# Altium PCB PCB_Pixhawk_Linux_Carrier_2021-08-31.pcbdoc (part 1 of 2)
Units mm, origin at the board's own origin, x right, y up, seen from the top; angles counter-clockwise.
Board outline 111.76 x 82.8 mm, 2 copper layers (Top Layer, Bottom Layer); 53 components, 220 nets, 468 pads, 151 vias.
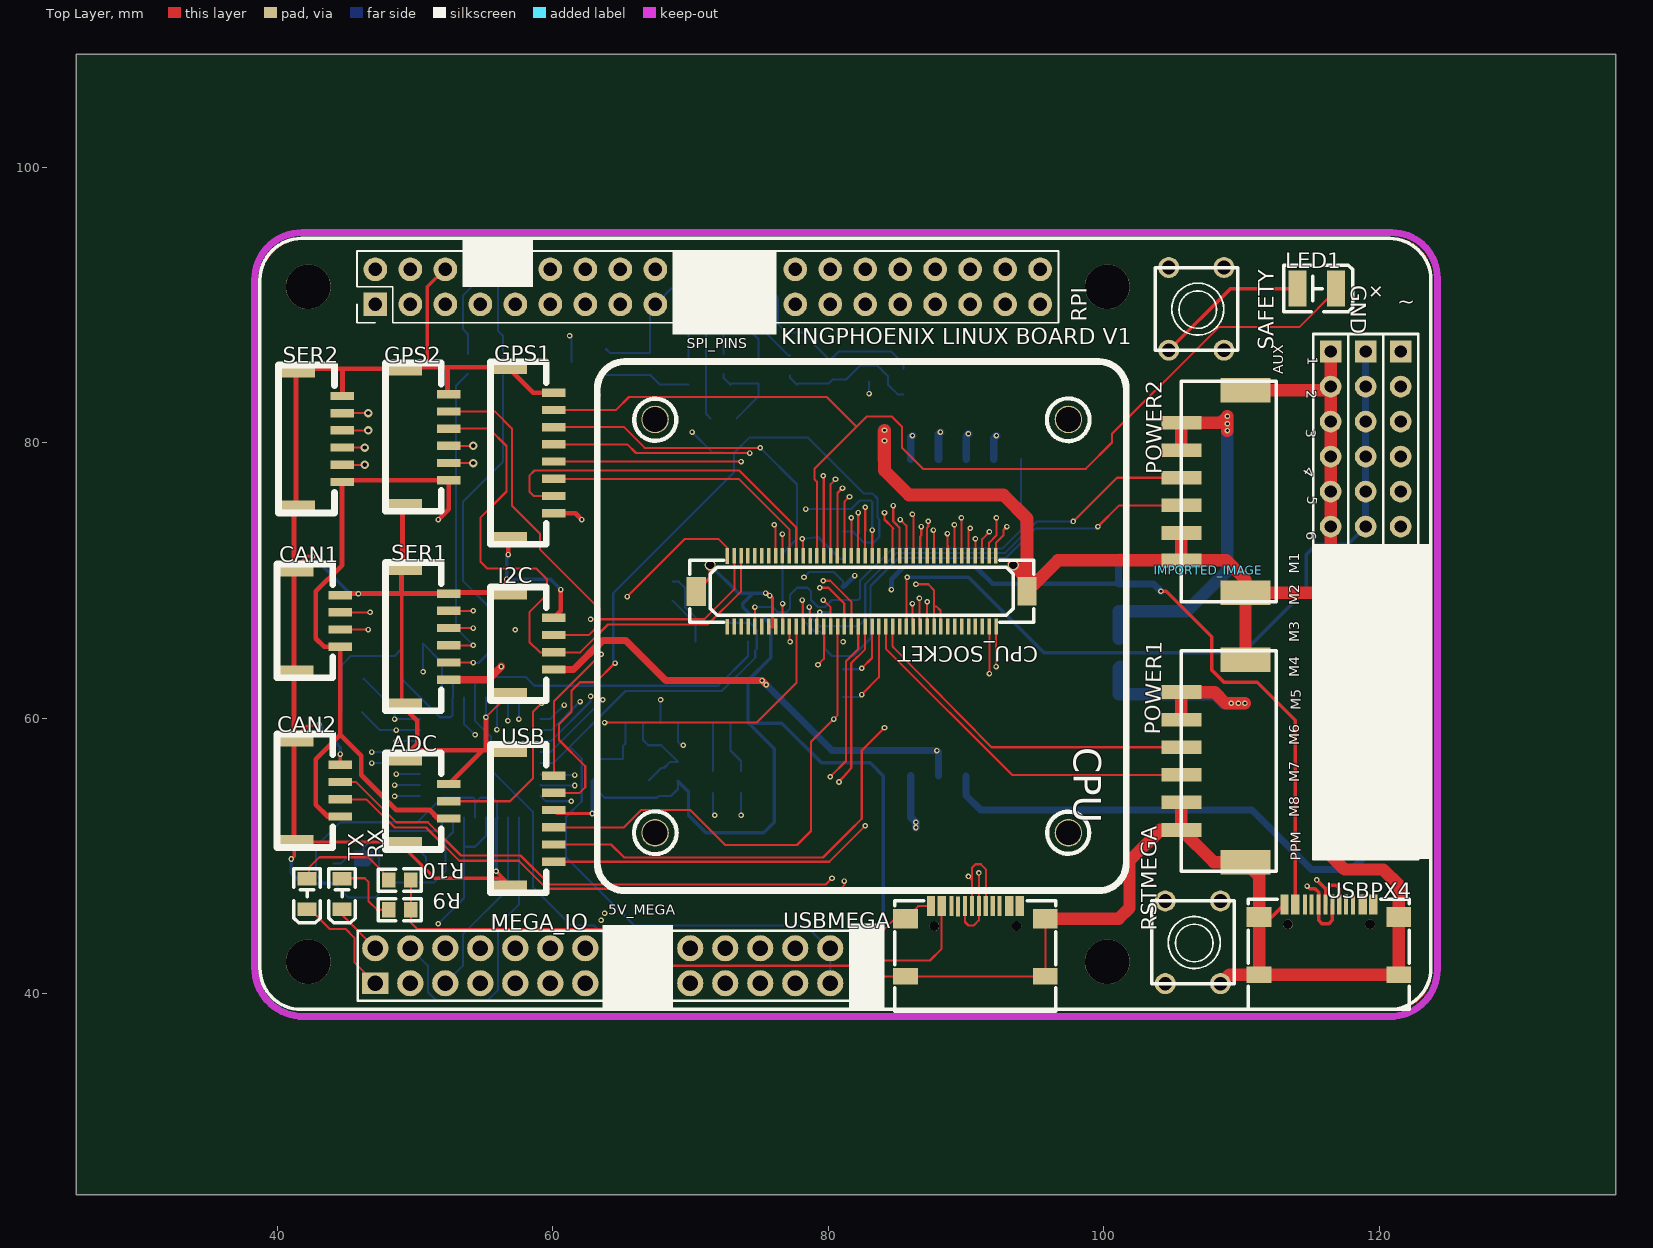
[diagram p0: Top Layer view]
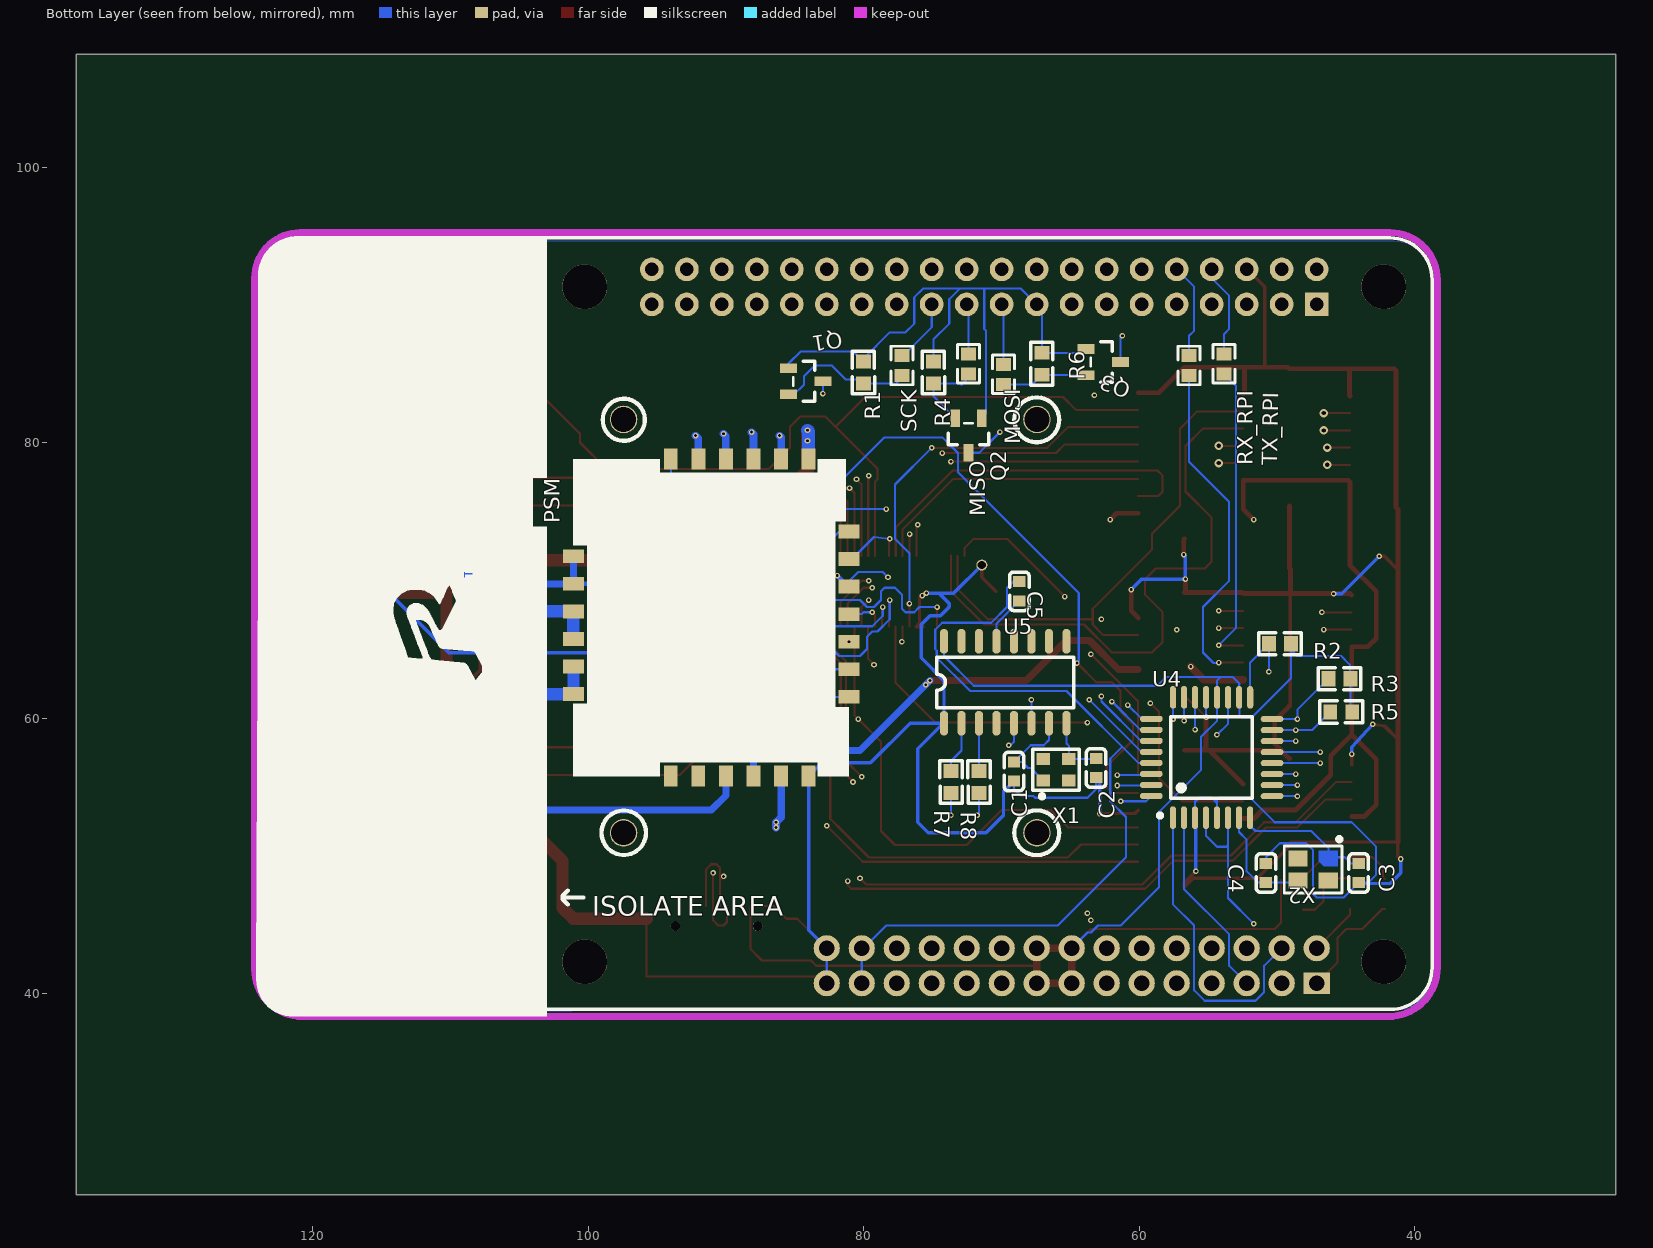
[diagram p1: Bottom Layer view, seen from below]

## Layer stack, top to bottom
Top Layer: signal copper (thickness not stored)
Dielectric: dielectric 0.32, FR-4, Dk 4.8
Bottom Layer: signal copper (thickness not stored)

## Board outline
137.16,25.4 25.4,25.4 25.4,108.204 137.16,108.204

## Components (designator, comment, footprint, x,y, rotation, side; value= is the part's Value field where it differs from the comment)
+ "SERVO_VCC" HDR-TH_15P-P2.54-V 118.999,68.834 r270 top
ADC "ADC" BM03B-GHS-TBT 52.451,53.975 r90 top
C1 "22pF" C0603 69.088,56.134 r270 bottom
C2 "22pF" C0603 63.119,56.388 r270 bottom
C3 "22pF" C0603 44.069,48.768 r270 bottom
C4 "22pF" C0603 50.8,48.768 r90 bottom
C5 "100nF" C0603 68.707,69.215 r90 bottom
CAN1 "CAN 1" BM04B-GHS-TBT 44.577,67.056 r90 top
CAN2 "CAN 2" BM04B-GHS-TBT 44.577,54.737 r90 top
CPU_SOCKET "pixhawk Cube" CON-DF17-80M 82.423,69.215 r180 top
GND "GND" HDR-TH_15P-P2.54-V 116.459,68.834 r270 top
GPS1 "GPS 1" BM08B-GHS-TBT 60.071,79.248 r90 top
GPS2 "GPS 2" BM06B-GHS-TBT 52.451,80.391 r90 top
I2C "I2C" BM04B-GHS-TBT 60.071,65.405 r90 top
IMPORTED_IMAGE "IMPORTED_IMAGE" IMPORTED_IMAGE 107.584,70.738 r0 top
LED1 "SAFETY" LED-SMD_L3.5-W2.8-R-RD 115.443,91.186 r180 top
MEGA_IO "Header-Male-2.54_2x15" HDR-TH_30P-P2.54-V-R2-C15-S2.54 64.897,42.037 r0 top
MISO "MOSI_CONNCECT" 0603 72.39,85.725 r270 bottom
MOSI "SCK_CONNCECT" 0603 69.85,84.963 r270 bottom
POWER1 "Power_1" "MOLEX CLICKMATE 2.0-6P" 107.95,56.896 r90 top
POWER2 "Power_2" "MOLEX CLICKMATE 2.0-6P" 107.95,76.454 r90 top
PSM "Power Selection Module" "POWER SELECTION MODULE" 91.313,67.056 r270 bottom
Q1 "BSS138" SOT-23-3_L2.9-W1.3-P1.90-LS2.4-BR 84.201,84.455 r180 bottom
Q2 "BSS138" SOT-23-3_L2.9-W1.3-P1.90-LS2.4-BR 72.39,80.518 r270 bottom
Q3 "BSS138" SOT-23-3_L2.9-W1.3-P1.90-LS2.4-BR 62.611,85.852 r180 bottom
R1 "10K" R0603#1 80.01,85.09 r270 bottom
R2 "10K" R0603#1 49.784,65.405 r0 bottom
R3 "10K" R0603#1 45.466,62.865 r0 bottom
R4 "10K" R0603#1 74.93,85.09 r270 bottom
R5 "10K" R0603#1 45.339,60.452 r0 bottom
R6 "10K" R0603#1 67.056,85.725 r270 bottom
R7 "1K" R0603#1 73.66,55.372 r90 bottom
R8 "1K" R0603#1 71.628,55.372 r90 bottom
R9 "1K" R0603#2 48.895,46.101 r180 top
R10 "1K" R0603#2 48.895,48.26 r180 top
RPI "RASPBERRY PI 4B" "RASPBERRY PI 4B" 47.117,90.043 r0 top
RSTMEGA "RESET_ARDU" SWITCH-6X6X5_TH 108.585,40.64 r0 top
RX "LEDRX" LED0805-RD 44.704,47.244 r90 top
RX_RPI "SCK_CONNCECT" 0603 56.388,85.598 r270 bottom
SAFETY "SAFETY" SWITCH-6X6X5_TH 108.839,86.614 r0 top
SCK "MISO_CONNECT" 0603 77.216,85.598 r270 bottom
SER1 "Telemetry 1" BM06B-GHS-TBT 52.451,65.913 r90 top
SER2 "Telemetry 2" BM06B-GHS-TBT 44.704,80.264 r90 top
TX "LEDTX" LED0805-RD 42.164,47.244 r90 top
TX_RPI "SCK_CONNCECT" 0603 53.848,85.725 r270 bottom
U4 "ATMEGA328P-AU" TQFP-32_L7.0-W7.0-P0.80-LS9.0-BL 54.737,57.15 r0 bottom
U5 "CH340G" SOIC-16_L9.9-W3.9-P1.27-LS6.0-TL 69.723,62.611 r0 bottom
USB "USB" BM06B-GHS-TBT 60.071,52.705 r90 top
USBMEGA "DEBUG_ARDU" USB-C-SMD_TYPEC-304S-ACP16 90.678,43.815 r0 top
USBPX4 "DEBUG_PX4" USB-C-SMD_TYPEC-304S-ACP16 116.332,43.942 r0 top
X1 "12MHz" OSC-SMD_4P-L2.5-W2.0-BL 66.04,56.261 r0 bottom
X2 "16MHz" OSC-SMD_4P-L3.2-W2.5-BL 47.371,49.022 r180 bottom
~ "DATA" HDR-TH_15P-P2.54-V 121.539,68.834 r270 top

## Footprints (in the part's own frame and the unit in brackets; to place one, negate y for a bottom-side part, rotate by r counter-clockwise, add the part's x,y. Pads: shape width x height; smd on the part's side, far side on the other; paste and mask are expansions set on the pad)
0603 [mm]
  rect 0.95x1.1 smd: 1(0.725,0) 2(-0.725,0)
  silkscreen extent -1.4,-0.8 1.4,0.8
BM03B-GHS-TBT [mm]
  rect 0.6x1.7 smd: 1(-1.25,0) 2(0,0) 3(1.25,0)
  rect 1x2.8 smd: GND(-3.1,3.35) GND(3.1,3.35)
  silkscreen extent -3.5,0.55 3.5,4.6
BM04B-GHS-TBT [mm]
  rect 0.6x1.7 smd: 1(-1.87,0) 2(-0.62,0) 3(0.63,0) 4(1.88,0)
  rect 1x2.8 smd: GND(-3.721,3.35) GND(3.729,3.35)
  silkscreen extent -4.12,0.55 4.13,4.6
BM06B-GHS-TBT [mm]
  rect 0.6x1.7 smd: 1(-3.12,0) 2(-1.87,0) 3(-0.62,0) 4(0.63,0) 5(1.88,0) 6(3.13,0)
  rect 1x2.8 smd: GND(-4.97,3.35) GND(4.97,3.35)
  silkscreen extent -5.37,0.55 5.38,4.6
BM08B-GHS-TBT [mm]
  rect 0.6x1.7 smd: 1(-4.37,0) 2(-3.12,0) 3(-1.87,0) 4(-0.62,0) 5(0.63,0) 6(1.88,0) 7(3.13,0) 8(4.38,0)
  rect 1x2.8 smd: GND(-6.22,3.35) GND(6.23,3.35)
  silkscreen extent -6.62,0.55 6.63,4.6
C0603 [mm]
  rect 0.8x0.9 smd: 1(0.7,0) 2(-0.7,0)
  silkscreen extent -1.4,-0.72 1.4,0.7
CON-DF17-80M [mm]
  rect 0.254x1.15 smd: 1(9.75,2.57) 2(9.75,-2.57) 3(9.252,2.565) 4(9.251,-2.575) 5(8.754,2.567) 6(8.755,-2.578) 7(8.254,2.567) 8(8.259,-2.577) 9(7.752,2.566) 10(7.757,-2.578) 11(7.252,2.566) 12(7.257,-2.578) 13(6.751,2.566) 14(6.755,-2.578) 15(6.251,2.566) 16(6.256,-2.578) 17(5.751,2.566) 18(5.755,-2.578) 19(5.251,2.565) 20(5.256,-2.579) 21(4.751,2.566) 22(4.755,-2.578) 23(4.25,2.566) 24(4.254,-2.578) 25(3.751,2.566) 26(3.755,-2.578) 27(3.252,2.567) 28(3.258,-2.575) 29(2.751,2.566) 30(2.757,-2.577) 31(2.257,2.567) 32(2.256,-2.578) 33(1.752,2.566) 34(1.761,-2.577) 35(1.253,2.567) 36(1.257,-2.578) 37(0.752,2.566) 38(0.758,-2.577) 39(0.253,2.566) 40(0.257,-2.578) 41(-0.249,2.566) 42(-0.242,-2.578) 43(-0.747,2.566) 44(-0.744,-2.578) 45(-1.248,2.566) 46(-1.242,-2.578) 47(-1.749,2.566) 48(-1.743,-2.578) 49(-2.248,2.566) 50(-2.245,-2.578) 51(-2.748,2.566) 52(-2.743,-2.578) 53(-3.246,2.566) 54(-3.244,-2.578) 55(-3.749,2.566) 56(-3.742,-2.578) 57(-4.245,2.565) 58(-4.245,-2.578) 59(-4.747,2.566) 60(-4.741,-2.579) 61(-5.248,2.566) 62(-5.244,-2.578) 63(-5.748,2.566) 64(-5.743,-2.578) 65(-6.247,2.567) 66(-6.244,-2.578) 67(-6.746,2.568) 68(-6.742,-2.577) 69(-7.248,2.566) 70(-7.242,-2.576) 71(-7.749,2.566) 72(-7.743,-2.578) 73(-8.245,2.566) 74(-8.245,-2.578) 75(-8.748,2.566) 76(-8.741,-2.578) 77(-9.246,2.566) 78(-9.244,-2.578) 79(-9.748,2.566) 80(-9.742,-2.578)
  round 2 hole 1.8: 81(-15,-12.47) 82(15,17.53) 83(-15,17.53) xx(15,-12.47)
  round 0.8 hole 0.6: HOLE1(11.001,-1.9) HOLE2(-11.001,-1.9)
  rect 1.4x2.101 smd: SIT1(12.011,0) SIT2(-12,0)
  silkscreen extent -19.2,-16.67 19.2,21.73
HDR-TH_15P-P2.54-V [mil]
  rect 62x62 hole 35: 1(-700,0)
  round 62 hole 35: 2(-600,0) 3(-500,0) 4(-400,0) 5(-300,0) 6(-200,0) 7(-100,0) 8(0,0) 9(100,0) 10(200,0) 11(300,0) 12(400,0) 13(500,0) 14(600,0) 15(700,0)
  silkscreen extent -750,-50 750,50
HDR-TH_30P-P2.54-V-R2-C15-S2.54 [mm]
  rect 1.9x1.575 hole 1.1: 1(-17.78,-1.27)
  round 1.9 hole 1.1: 2(-17.78,1.27) 3(-15.24,-1.27) 4(-15.24,1.27) 5(-12.7,-1.27) 6(-12.7,1.27) 7(-10.16,-1.27) 8(-10.16,1.27) 9(-7.62,-1.27) 10(-7.62,1.27) 11(-5.08,-1.27) 12(-5.08,1.27) 13(-2.54,-1.27) 14(-2.54,1.27) 15(0,-1.27) 16(0,1.27) 17(2.54,-1.27) 18(2.54,1.27) 19(5.08,-1.27) 20(5.08,1.27) 21(7.62,-1.27) 22(7.62,1.27) 23(10.16,-1.27) 24(10.16,1.27) 25(12.7,-1.27) 26(12.7,1.27) 27(15.24,-1.27) 28(15.24,1.27) 29(17.78,-1.27) 30(17.78,1.27)
  silkscreen extent -19.05,-2.54 19.05,2.54
IMPORTED_IMAGE [mm]
LED0805-RD [mm]
  rect 1x1.4 smd: 1(-1.1,0) 2(1.1,0)
  silkscreen extent -2.1,-0.95 1.85,0.95
LED-SMD_L3.5-W2.8-R-RD [mm]
  rect 1.3x2.6 smd: 1(1.4,0) 2(-1.4,0)
  silkscreen extent -2.6,-1.7 2.4,1.7
"MOLEX CLICKMATE 2.0-6P" [mm]
  rect 1x2.9 smd: 1(5,2.325) 2(3,2.325) 3(1,2.325) 4(-1,2.325) 5(-3,2.325) 6(-5,2.325)
  rect 1.8x3.6 smd: 7(-7.35,-2.325) 7(7.35,-2.325)
  silkscreen extent -8,-4.57 8,2.32
OSC-SMD_4P-L2.5-W2.0-BL [mm]
  rect 1x0.9 smd: 1(0.93,0.78) 2(-0.93,0.78) 3(-0.93,-0.78) 4(0.93,-0.78)
  silkscreen extent -1.7,-1.5 1.7,2.08
OSC-SMD_4P-L3.2-W2.5-BL [mm]
  round 0 smd: 1(1.1,0.8)
  rect 1.4x1.15 smd: 2(-1.1,0.8) 3(-1.1,-0.8) 4(1.1,-0.8)
  Top Layer region: 1.8,0.225 0.762,0.225 0.4,0.604 0.4,1.375 1.8,1.375
  silkscreen extent -2.1,-1.7 2.1,2.35
"POWER SELECTION MODULE" [mm]
  rect 1.524x1 smd: 1(11.25,-2.69) 2(11.25,-0.69) 3(11.255,1.32) 4(11.25,3.32) 5(11.25,5.32) 6(11.25,7.32) 14(-11.75,7.32) 15(-11.75,5.32) 16(-11.75,3.32) 17(-11.753,1.32) 18(-11.747,-0.68) 19(-11.75,-2.68)
  rect 1x1.524 smd: 7(5.5,10.25) 8(3.5,10.25) 9(1.5,10.25) 10(-0.5,10.247) 11(-2.5,10.25) 12(-4.5,10.252) 13(-6.5,10.247) 20(-4.7,-9.75) 21(-2.7,-9.75) 22(-0.7,-9.748) 23(1.3,-9.75) 24(3.3,-9.75) 25(5.3,-9.748)
  silkscreen extent -11.75,-9.75 11.25,10.25
R0603#1 [mm]
  rect 1x1.1 smd: 1(0.8,0) 2(-0.8,0)
  silkscreen extent -1.55,-0.81 1.55,0.8
R0603#2 [mm]
  rect 1x1.1 smd: 1(-0.8,0) 2(0.8,0)
  silkscreen extent -1.55,-0.8 1.55,0.81
"RASPBERRY PI 4B" [mm]
  rect 1.7x1.7 hole 1: 1(-0.001,0)
  round 1.725 hole 1: 2(0,2.54) 3(2.54,0) 4(2.54,2.54) 5(5.08,0) 6(5.08,2.54) 7(7.62,0) 8(7.62,2.54) 9(10.16,0) 10(10.16,2.54) 11(12.7,0) 12(12.7,2.54) 13(15.24,0) 14(15.24,2.54) 15(17.78,0) 16(17.78,2.54) 17(20.32,0) 18(20.32,2.54) 19(22.86,0) 20(22.86,2.54) 21(25.4,0) 22(25.4,2.54) 23(27.94,0) 24(27.94,2.54) 25(30.48,0) 26(30.48,2.54) 27(33.02,0) 28(33.02,2.54) 29(35.56,0) 30(35.56,2.54) 31(38.1,0) 32(38.1,2.54) 33(40.64,0) 34(40.64,2.54) 35(43.18,0) 36(43.18,2.54) 37(45.72,0) 38(45.72,2.54) 39(48.26,0) 40(48.26,2.54)
  round 3.25 hole 3.25 unplated: ""(-4.87,-47.72) ""(-4.87,1.28) ""(53.13,-47.72) ""(53.13,1.28)
  silkscreen extent -8.38,-51.17 76.62,4.78
SOIC-16_L9.9-W3.9-P1.27-LS6.0-TL [mm]
  oval 0.6x1.8 smd: 1(4.445,2.972) 2(3.175,2.972) 3(1.905,2.972) 4(0.635,2.972) 5(-0.635,2.972) 6(-1.905,2.972) 7(-3.175,2.972) 8(-4.445,2.972) 9(-4.445,-2.972) 10(-3.175,-2.972) 11(-1.905,-2.972) 12(-0.635,-2.972) 13(0.635,-2.972) 14(1.905,-2.972) 15(3.175,-2.972) 16(4.445,-2.972)
  silkscreen extent -4.98,-1.83 4.98,1.85
SOT-23-3_L2.9-W1.3-P1.90-LS2.4-BR [mm]
  rect 1.25x0.7 smd: 1(-1.25,0.95) 2(-1.25,-0.95) 3(1.25,0)
  silkscreen extent -0.9,-1.46 0.65,1.46
SWITCH-6X6X5_TH [mil]
  round 60 hole 39.37: 1(-162.5,240) 2(-162.5,3.8) 3(-5,240) 4(-5,3.8)
  silkscreen extent -202,4 34,240
TQFP-32_L7.0-W7.0-P0.80-LS9.0-BL [mm]
  oval 0.45x1.65 smd: 1(2.817,4.369) 2(2.017,4.369) 3(1.217,4.369) 4(0.417,4.369) 5(-0.381,4.369) 6(-1.181,4.369) 7(-1.981,4.369) 8(-2.781,4.369) 17(-2.791,-4.369) 18(-1.991,-4.369) 19(-1.191,-4.369) 20(-0.391,-4.369) 21(0.406,-4.369) 22(1.206,-4.369) 23(2.007,-4.369) 24(2.807,-4.369)
  oval 1.65x0.45 smd: 9(-4.381,2.804) 10(-4.381,2.004) 11(-4.381,1.204) 12(-4.381,0.404) 13(-4.381,-0.394) 14(-4.381,-1.194) 15(-4.381,-1.994) 16(-4.381,-2.794) 25(4.381,-2.804) 26(4.381,-2.004) 27(4.381,-1.204) 28(4.381,-0.404) 29(4.381,0.394) 30(4.381,1.194) 31(4.381,1.994) 32(4.381,2.794)
  silkscreen extent -2.94,-2.95 3.91,4.36
USB-C-SMD_TYPEC-304S-ACP16 [mm]
  rect 1.8x1.45 smd: 13(-5.07,1.632) 14(5.07,1.632)
  rect 1.8x1.2 smd: 15(-5.07,-2.548) 16(5.07,-2.548)
  rect 0.6x1.45 smd: A1B12(-3.225,2.547) A4B9(-2.45,2.547) B1A12(3.22,2.547) B4A9(2.45,2.547)
  rect 0.3x1.45 smd: A5(-1.26,2.532) A6(-0.25,2.547) A7(0.25,2.547) A8(1.25,2.547) B5(1.75,2.547) B6(0.75,2.547) B7(-0.75,2.547) B8(-1.75,2.547)
  round 0.7 hole 0.7 unplated: ""(-2.98,1.102) ""(2.98,1.102)
  silkscreen extent -5.84,-5.08 5.84,2.92

## Via types
v1: diameter 0.4, hole 0.2, Top Layer to Bottom Layer, 145 vias
v2: diameter 0.61, hole 0.305, Top Layer to Bottom Layer, 6 vias

## Nets (pads, with @x,y where several pads share a name; then routed paths per layer and width w, separated by ;. In a path a pad name is that pad's centre, name@x,y a point inside that pad or via, vN(x,y) a via of type N, cw(c..) or ccw(c..) an arc to the next point about the centre after c; other vN are vias at no path point)
A0: MEGA_IO.19 U4.23 | length 27.8
  Mid-Layer 2 w0.15: v1(56.744,59.817) 56.769,59.792 56.769,53.467 65.405,44.831 67.945,44.831 68.707,44.069 68.707,41.91 69.85,40.767 MEGA_IO.19@69.977,40.767
  Bottom Layer w0.15: v1(56.744,59.817) U4.23@56.744,61.519
A1: MEGA_IO.20 U4.24 | length 25.1
  Mid-Layer 2 w0.15: v1(57.544,59.944) 57.544,53.988 57.531,53.34 65.405,45.339 68.199,45.339 69.977,43.561 MEGA_IO.20@69.977,43.307 ; 60.849,49.968 60.849,50.099
  Bottom Layer w0.15: v1(57.544,59.944) U4.24@57.544,61.519
A2: MEGA_IO.21 U4.25 | length 31.7
  Mid-Layer 2 w0.15: v1(60.833,60.96) 60.833,58.674 58.166,56.007 58.166,53.213 65.532,45.847 69.469,45.847 71.247,44.069 71.247,42.037 MEGA_IO.21@72.517,40.767
  Bottom Layer w0.15: U4.25@59.118,59.954 59.827,59.954 v1(60.833,60.96)
A3: MEGA_IO.22 U4.26 | length 31.2
  Mid-Layer 2 w0.15: v1(61.976,61.214) 61.976,60.833 61.137,59.994 61.137,58.47 58.47,55.803 58.47,53.417 65.659,46.228 69.596,46.228 MEGA_IO.22@72.517,43.307
  Bottom Layer w0.15: U4.26@59.118,59.154 59.916,59.154 v1(61.976,61.214)
A4: MEGA_IO.23 U4.27 | length 37.5
  Mid-Layer 2 w0.15: v1(62.738,61.595) 62.738,60.96 61.468,59.69 61.468,58.293 58.928,55.753 58.928,53.467 65.786,46.609 71.374,46.609 73.787,44.196 73.787,42.037 MEGA_IO.23@75.057,40.767
  Bottom Layer w0.15: U4.27@59.118,58.354 59.878,58.354 62.738,61.214 v1(62.738,61.595)
A5: MEGA_IO.24 U4.28 | length 36.1
  Mid-Layer 2 w0.15: v1(63.627,61.341) 61.772,59.486 61.772,58.089 59.309,55.626 59.309,53.594 65.913,46.99 72.263,46.99 74.93,44.323 74.93,43.434 MEGA_IO.24@75.057,43.307
  Bottom Layer w0.15: U4.28@59.118,57.554 59.84,57.554 v1(63.627,61.341)
A6: MEGA_IO.25 U4.19 | length 37.6
  Mid-Layer 1 w0.15: v1(63.5,45.339) 75.184,45.339 76.327,44.196 76.327,42.037 MEGA_IO.25@77.597,40.767
  Mid-Layer 2 w0.15: v1(54.356,58.801) 54.483,58.801 55.499,57.785 55.499,53.34 v1(63.5,45.339)
  Bottom Layer w0.15: U4.19@53.546,61.519 53.546,59.611 v1(54.356,58.801)
A7: MEGA_IO.26 U4.22 | length 34.5
  Mid-Layer 1 w0.15: v1(63.754,45.847) 76.2,45.847 77.597,44.45 MEGA_IO.26@77.597,43.307
  Mid-Layer 2 w0.15: v1(55.944,59.182) 55.944,53.657 v1(63.754,45.847)
  Bottom Layer w0.15: v1(55.944,59.182) U4.22@55.944,61.519
ALARM: CPU_SOCKET.24 PSM.12 | length 5
  Top Layer w0.15: v1(78.105,73.025) 78.168,73.088 CPU_SOCKET.24@78.169,71.793
  Bottom Layer w0.15: v1(78.105,73.025) 79.248,73.152 80.843,71.557 PSM.12@81.061,71.556
ARDU_DTR: C5.2 U5.13 | length 3.6
  Bottom Layer w0.15: C5.2@68.707,68.515 70.358,66.864 U5.13@70.358,65.583
ARDU_RXD: R8.1 U5.3 | length 3.5
  Bottom Layer w0.15: R8.1@71.628,56.172 U5.3@71.628,59.639
ARDU_TXD: R7.1 U5.2 | length 3.8
  Bottom Layer w0.15: U5.2@72.898,59.639 72.898,57.658 73.66,56.896 R7.1@73.66,56.172
AUX_BAT_CURRENT_SENS: CPU_SOCKET.25 POWER2.3 | length 35.5
  Top Layer w0.15: v1(78.613,68.072) 78.672,68.013 CPU_SOCKET.25@78.672,66.649 ; v1@97.663,74.168 100.949,77.454 POWER2.3@105.625,77.454
  Bottom Layer w0.15: v1(78.613,68.072) 78.613,67.437 79.375,66.675 82.169,66.675 82.677,67.183 82.677,69.723 84.963,72.009 92.837,72.009 95.111,74.283 v1(97.778,74.283)
AUX_BAT_VOLTAGE_SENS: CPU_SOCKET.23 POWER2.4 | length 39.3
  Top Layer w0.15: v1(78.105,68.58) 78.173,68.512 CPU_SOCKET.23@78.173,66.649 ; v1(99.568,73.914) 101.108,75.454 POWER2.4@105.625,75.454
  Bottom Layer w0.15: v1(78.105,68.58) 78.105,67.183 78.994,66.294 79.375,66.294 79.756,65.913 79.756,65.024 80.264,64.516 81.788,64.516 83.058,65.786 83.058,69.596 85.09,71.628 92.885,71.628 95.044,73.787 99.441,73.787 v1(99.568,73.914)
BATT_CURRENT_SENS_PROT: CPU_SOCKET.49 POWER1.3 | length 25.5
  Top Layer w0.15: CPU_SOCKET.49@84.671,66.649 84.671,65.24 84.709,65.151 91.837,57.896 POWER1.3@105.625,57.896
BATT_VOLTAGE_SENS_PROT: CPU_SOCKET.47 POWER1.4 | length 26.8
  Top Layer w0.15: CPU_SOCKET.47@84.172,66.649 84.171,65.053 93.329,55.896 POWER1.4@105.625,55.896
BUZZER_OUT: PSM.13 USB.5 | length 52.2
  Top Layer w0.15: USB.5@60.071,54.585 61.951,54.585 62.357,54.991 62.357,56.515 60.452,58.42 60.452,59.563 61.341,60.452 61.341,61.976 61.976,62.611 63.119,62.611 v1(64.516,64.008)
  Bottom Layer w0.15: v1(64.516,64.008) 64.389,64.135 64.389,69.088 73.152,77.851 73.152,79.248 74.295,80.391 78.486,80.391 82.55,76.327 83.185,76.327 83.566,75.946 83.566,74.549 83.693,74.422 83.693,73.152 83.312,72.771 82.55,72.771 81.765,73.556 PSM.13@81.066,73.556
CAN_H_1: CAN1.2 CPU_SOCKET.79 | length 55
  Top Layer w0.15: CAN1.2@44.577,66.436 v1(46.609,66.436) ; v1(92.171,63.754) CPU_SOCKET.79@92.171,66.649
  Mid-Layer 1 w0.15: v1(62.738,67.183) 63.119,66.802 85.217,66.802 88.265,63.754 v1(92.171,63.754)
  Mid-Layer 2 w0.15: v1(46.609,66.436) 46.467,66.436 46.101,66.802 46.101,67.945 46.609,68.453 61.468,68.453 v1(62.738,67.183)
CAN_H_2: CAN2.2 CPU_SOCKET.41 | length 59.1
  Top Layer w0.15: CAN2.2@44.577,54.117 46.467,54.117 48.514,52.07 50.8,52.07 53.213,49.657 57.531,49.657 59.563,47.625 80.901,47.625 81.155,47.884 v1(81.153,48.182) ; v1(80.772,55.372) 81.661,56.388 81.661,64.008 82.672,65.019 CPU_SOCKET.41@82.672,66.649
  Mid-Layer 1 w0.15: v1(80.772,55.372) 80.772,49.022 81.153,48.641 v1(81.153,48.182)
CAN_H_3: CPU_SOCKET.10
CAN_L_1: CAN1.3 CPU_SOCKET.77 | length 52.7
  Top Layer w0.15: CAN1.3@44.577,67.686 v1(46.736,67.686) ; CPU_SOCKET.77@91.669,66.649 91.694,66.624 v1(91.694,63.246)
  Mid-Layer 1 w0.15: v1(57.277,66.421) 85.09,66.421 88.265,63.246 v1(91.694,63.246)
  Mid-Layer 2 w0.15: v1(46.736,67.686) 51.44,67.686 53.086,66.04 56.896,66.04 v1(57.277,66.421)
CAN_L_2: CAN2.3 CPU_SOCKET.39 | length 58.1
  Top Layer w0.15: CAN2.3@44.577,55.367 45.725,55.367 48.641,52.451 50.927,52.451 53.34,50.038 57.658,50.038 59.767,47.929 79.806,47.929 v1(80.264,48.387) ; v1(80.137,55.753) 81.28,56.896 81.28,64.135 82.17,65.025 CPU_SOCKET.39@82.17,66.649
  Mid-Layer 1 w0.15: v1(80.137,55.753) 80.137,48.514 v1(80.264,48.387)
CAN_L_3: CPU_SOCKET.8
D0: MEGA_IO.1 R7.2 TX.1 U4.30 | length 52.9
  Top Layer w0.15: TX.1@42.164,46.144 42.375,46.144 43.815,44.704 44.958,44.704 45.593,44.069 45.593,42.291 MEGA_IO.1@47.117,40.767
  Mid-Layer 1 w0.15: MEGA_IO.1@47.117,40.767 48.387,42.037 48.387,49.022 50.419,51.054 56.134,51.054 59.817,54.737 61.272,54.737 ; 61.272,54.737 61.526,54.483 62.103,54.483 62.484,54.864 62.484,55.626 62.23,55.88 v1(61.595,55.88)
  Mid-Layer 2 w0.15: v1(61.595,55.88) 70.739,55.88 v1(73.66,52.959)
  Bottom Layer w0.15: U4.30@59.118,55.956 59.195,55.88 v1(61.595,55.88) ; v1(73.66,52.959) R7.2@73.66,54.572
D1: MEGA_IO.2 R8.2 RX.1 U4.31 | length 41.4
  Top Layer w0.15: RX.1@44.704,46.144 44.704,45.72 MEGA_IO.2@47.117,43.307
  Mid-Layer 1 w0.15: MEGA_IO.2@47.117,43.307 47.117,48.387 50.165,51.435 56.007,51.435 59.69,55.118 v1(61.595,55.118)
  Mid-Layer 2 w0.15: v1(61.595,55.118) 69.596,55.118 v1(71.755,52.959)
  Bottom Layer w0.15: U4.31@59.118,55.156 59.157,55.118 v1(61.595,55.118) ; R8.2@71.628,54.572 71.628,53.086 v1(71.755,52.959)
D2: MEGA_IO.3 U4.32 | length 24.2
  Mid-Layer 1 w0.15: MEGA_IO.3@49.657,40.767 50.927,42.037 50.927,50.038 51.562,50.673 56.388,50.673 59.69,53.975 v1(61.341,53.975)
  Bottom Layer w0.15: U4.32@59.118,54.356 59.499,53.975 v1(61.341,53.975)
D3: MEGA_IO.4 U4.1 | length 22.5
  Bottom Layer w0.15: MEGA_IO.4@49.657,43.307 50.927,42.037 50.927,40.132 51.562,39.497 55.245,39.497 56.007,40.259 56.007,44.958 57.554,46.505 U4.1@57.554,52.781
D4: MEGA_IO.5 U4.2 | length 13.9
  Bottom Layer w0.15: MEGA_IO.5@52.197,40.767 53.467,42.037 53.467,44.323 56.754,47.61 U4.2@56.754,52.781
D5: MEGA_IO.6 U4.9 | length 15
  Mid-Layer 2 w0.15: v1(48.514,54.346) 49.53,54.356 52.197,51.689 MEGA_IO.6@52.197,43.307
  Bottom Layer w0.15: v1(48.514,54.346) U4.9@50.355,54.346
D6: MEGA_IO.7 U4.10 | length 19.5
  Mid-Layer 2 w0.15: v1(48.514,55.146) 48.613,55.245 49.403,55.245 52.501,52.147 52.501,44.908 53.467,43.942 53.467,42.164 54.737,40.894 MEGA_IO.7@54.737,40.767
  Bottom Layer w0.15: v1(48.514,55.146) U4.10@50.355,55.146
D7: MEGA_IO.8 U4.11 | length 17.4
  Mid-Layer 2 w0.15: v1(48.641,55.946) 48.702,56.007 49.403,56.007 52.806,52.604 52.806,45.238 MEGA_IO.8@54.737,43.307
  Bottom Layer w0.15: v1(48.641,55.946) U4.11@50.355,55.946
D8: MEGA_IO.9 U4.12 | length 26.2
  Mid-Layer 2 w0.15: v1(46.863,56.746) 49.403,56.769 53.109,53.063 53.109,45.443 53.467,45.085 54.991,45.085 56.007,44.069 56.007,42.291 57.277,41.021 MEGA_IO.9@57.277,40.767
  Bottom Layer w0.15: v1(46.863,56.746) U4.12@50.355,56.746
D9: MEGA_IO.10 U4.13 | length 24.6
  Mid-Layer 2 w0.15: v1(46.863,57.544) 49.657,57.531 53.414,53.774 53.414,45.646 53.594,45.466 55.118,45.466 MEGA_IO.10@57.277,43.307
  Bottom Layer w0.15: v1(46.863,57.544) U4.13@50.355,57.544
D10: MEGA_IO.11 U4.14 | length 24.8
  Mid-Layer 2 w0.15: v1(48.641,58.344) 48.692,58.293 49.911,58.293 53.718,54.486 53.718,48.771 58.547,43.942 58.547,41.783 59.563,40.767 MEGA_IO.11@59.817,40.767
  Bottom Layer w0.15: v1(48.641,58.344) U4.14@50.355,58.344
D11: MEGA_IO.12 Q3.3 R5.1 U4.15 | length 82.8
  Mid-Layer 2 w0.15: MEGA_IO.12@59.817,43.307 59.69,43.307 54.102,48.895 54.102,55.245 50.165,59.182 48.679,59.182 v1(48.641,59.144) 42.202,59.144 40.64,60.706 40.64,84.836 43.561,87.757 v1(61.214,87.757)
  Bottom Layer w0.15: R5.1@46.139,60.452 47.447,59.144 v1(48.641,59.144) U4.15@50.355,59.144 ; v1(61.214,87.757) 61.361,87.61 Q3.3@61.361,85.852
D11_L: MOSI.1 Q3.2 R6.1 | length 6.3
  Bottom Layer w0.15: Q3.2@63.861,84.902 R6.1@67.056,84.925 67.743,84.238 MOSI.1@69.85,84.238
D12: MEGA_IO.13 Q2.3 R3.1 U4.16 | length 101.8
  Mid-Layer 2 w0.15: MEGA_IO.13@62.357,40.767 62.357,40.894 61.087,42.164 61.087,43.942 60.198,44.831 58.801,44.831 54.483,49.149 54.483,56.388 50.927,59.944 v1(48.514,59.944) 42.164,59.944 41.021,61.087 41.021,84.328 43.815,87.122 59.309,87.122 60.833,85.598 68.707,85.598 70.104,84.201 v1(70.104,80.772)
  Bottom Layer w0.15: R3.1@46.266,62.865 48.514,60.617 v1(48.514,59.944) U4.16@50.355,59.944 ; v1(70.104,80.772) 71.608,79.268 Q2.3@72.39,79.268
D12_L: MISO.1 Q2.2 R4.1 | length 6.3
  Bottom Layer w0.15: MISO.1@72.39,85 72.39,84.709 72.898,84.201 72.987,84.29 R4.1@74.93,84.29 74.93,83.358 Q2.2@73.34,81.768
D13: MEGA_IO.14 Q1.3 R2.1 U4.17 | length 105.2
  Mid-Layer 1 w0.15: v1(63.246,83.439) 82.824,83.439 v1(82.951,83.566)
  Mid-Layer 2 w0.15: v1@50.546,63.373 51.943,61.976 51.943,59.944 55.118,56.769 55.118,53.213 62.357,45.974 MEGA_IO.14@62.357,43.307 ; v1(50.584,63.373) 42.418,63.373 41.402,64.389 41.402,83.82 43.942,86.36 59.309,86.36 60.96,84.709 61.976,84.709 v1(63.246,83.439)
  Bottom Layer w0.15: v1(50.584,63.373) R2.1@50.584,65.405 51.945,64.043 U4.17@51.946,61.519 ; v1(82.951,83.566) Q1.3@82.951,84.455
D13_L: Q1.2 R1.1 SCK.1 | length 10.4
  Bottom Layer w0.15: SCK.1@77.216,84.873 77.216,84.709 77.724,84.201 77.813,84.29 R1.1@80.01,84.29 80.302,84.582 81.28,84.582 82.296,85.598 83.566,85.598 84.328,84.836 84.328,84.201 85.024,83.505 Q1.2@85.451,83.505
EXTERN_CS: CPU_SOCKET.5
EXTERN_DRDY: CPU_SOCKET.11
FMU-!RESET: CPU_SOCKET.7
FMU-CH1-PROT: CPU_SOCKET.50 ~.1 | length 48.4
  Top Layer w0.15: v1(84.074,74.93) 84.074,74.422 84.709,73.787 84.668,73.746 CPU_SOCKET.50@84.668,71.793
  Mid-Layer 1 w0.254: v1(84.074,74.93) 84.074,75.438 87.249,78.613 107.95,78.613 113.792,84.455 113.792,86.233 115.697,88.138 120.142,88.138 121.539,86.741 ~.1@121.539,86.614
FMU-CH2-PROT: CPU_SOCKET.52 ~.2 | length 45.3
  Top Layer w0.15: v1(84.709,75.438) 84.709,74.295 84.836,74.168 85.166,73.838 CPU_SOCKET.52@85.166,71.793
  Mid-Layer 1 w0.254: v1(84.709,75.438) 86.868,77.597 108.077,77.597 115.824,85.344 119.888,85.344 121.158,84.074 ~.2@121.539,84.074
FMU-CH3-PROT: CPU_SOCKET.54 ~.3 | length 43.5
  Top Layer w0.15: v1(85.217,74.422) 85.667,73.972 CPU_SOCKET.54@85.667,71.793
  Mid-Layer 1 w0.254: v1(85.217,74.422) 85.217,75.057 86.995,76.835 109.22,76.835 115.189,82.804 120.269,82.804 ~.3@121.539,81.534
FMU-CH4-PROT: CPU_SOCKET.56 ~.4 | length 41.3
  Top Layer w0.15: v1(86.106,74.803) 86.165,74.744 CPU_SOCKET.56@86.165,71.793
  Mid-Layer 1 w0.254: v1(86.106,74.803) 87.63,76.327 111.887,76.327 115.824,80.264 120.142,80.264 121.412,78.994 ~.4@121.539,78.994
FMU-CH5-PROT: CPU_SOCKET.58 ~.5 | length 39.4
  Top Layer w0.15: CPU_SOCKET.58@86.668,71.793 86.668,73.206 86.741,73.279 v1(86.741,73.914)
  Mid-Layer 1 w0.254: v1(86.741,73.914) 86.741,74.549 88.011,75.819 112.522,75.819 114.427,77.724 119.888,77.724 121.158,76.454 ~.5@121.539,76.454
FMU-CH6-PROT: CPU_SOCKET.60 ~.6 | length 37.7
  Top Layer w0.15: CPU_SOCKET.60@87.164,71.794 87.164,73.829 87.249,73.914 v1(87.249,74.295)
  Mid-Layer 1 w0.254: v1(87.249,74.295) 88.138,75.184 120.015,75.184 121.285,73.914 ~.6@121.539,73.914
FMU-LED_AMBER: CPU_SOCKET.2 USB.6 | length 25.2
  Top Layer w0.15: USB.6@60.071,55.835 60.071,61.214 v1(63.5,64.643) ; v1(65.405,68.834) 69.596,73.025 72.009,73.025 72.673,72.361 CPU_SOCKET.2@72.673,71.785
  Mid-Layer 2 w0.15: v1(63.5,64.643) 63.881,65.024 63.881,67.564 65.151,68.834 v1(65.405,68.834)
FMU-SWCLK: CPU_SOCKET.3
FMU-SWDIO: CPU_SOCKET.1
GND: ADC.3 ADC.GND C1.1 C2.1 C3.1 C4.1 CAN1.4 CAN1.GND CAN2.4 CAN2.GND CPU_SOCKET.13 CPU_SOCKET.15 CPU_SOCKET.HOLE1 CPU_SOCKET.HOLE2 CPU_SOCKET.SIT1 CPU_SOCKET.SIT2 GND.1 GND.2 GND.3 GND.4 GND.5 GND.6 GND.7 GND.8 GND.9 GND.10 GND.11 GND.12 GND.13 GND.14 GND.15 GPS1.8 GPS1.GND GPS2.6 GPS2.GND I2C.4 I2C.GND MEGA_IO.29 MEGA_IO.30 POWER1.5 POWER1.6 POWER1.7 POWER2.5 POWER2.6 POWER2.7 PSM.6 PSM.14 RPI.6 RSTMEGA.4 SER1.6 SER1.GND SER2.6 SER2.GND U4.3 U4.5 U4.21 U5.1 USB.4 USB.GND USBMEGA.13 USBMEGA.14 USBMEGA.15 USBMEGA.16 USBMEGA.A1B12 USBPX4.13 USBPX4.14 USBPX4.15 USBPX4.16 USBPX4.A1B12 | length 482.6
  Top Layer w0.15: v1(55.143,60.071) 56.721,61.649 I2C.GND@56.721,61.684 ; MEGA_IO.29@82.677,40.767 83.177,41.267 USBMEGA.15@85.608,41.267 USBMEGA.16@95.748,41.267 USBMEGA.14@95.748,45.447 ; MEGA_IO.30@82.677,43.307 84.817,45.447 USBMEGA.13@85.608,45.447 86.523,46.362 USBMEGA.A1B12@87.453,46.362
  Top Layer w0.25: v1(41.021,49.784) 41.227,49.99 CAN2.GND@41.227,51.016 48.96,51.016 49.101,50.875 49.101,50.721 51.435,48.387 56.069,48.387 USB.GND@56.721,47.735 56.721,48.054 v1(55.88,48.895) ; CAN2.GND@41.227,58.466 42.197,59.436 v1(43.053,59.563) ; CAN1.GND@41.227,70.785 42.198,71.755 v1(42.573,71.755) ; CAN2.4@44.577,56.617 v1(44.577,57.404) ; 49.041,69.043 49.041,61.003 SER1.GND@49.101,60.943 ; 50.902,85.478 50.902,91.313 RPI.6@52.197,92.583 ; USB.4@60.071,53.335 60.32,53.086 v1(62.865,53.086) ; CPU_SOCKET.SIT1@70.412,69.215 71.422,70.225 CPU_SOCKET.HOLE1@71.422,71.115 ; v1(75.438,69.088) 75.565,69.088 v1(75.75,68.903) 75.946,68.707 75.946,66.874 CPU_SOCKET.15@76.172,66.649 CPU_SOCKET.13@75.672,66.649
  Top Layer w0.254: USBPX4.13@111.262,45.574 112.192,45.575 USBPX4.A1B12@113.107,46.489
  Top Layer w0.35: CAN2.GND@41.227,51.016 CAN2.GND@41.227,58.466 CAN1.GND@41.227,63.335 CAN1.GND@41.227,70.785 41.227,75.167 SER2.GND@41.354,75.294 SER2.GND@41.354,85.234 41.481,85.361 GPS2.GND@49.101,85.361 49.218,85.478 GPS1.GND@56.721,85.478 58.571,83.628 GPS1.8@60.071,83.628 ; CAN1.4@44.577,68.936 44.684,69.043 v1(45.892,69.043) SER1.6@52.451,69.043 52.541,69.133 I2C.GND@56.721,69.134 56.642,69.212 v1(56.642,70.104) ; SER2.6@44.704,83.394 44.745,83.435 44.745,85.361 ; 49.022,69.043 49.022,70.804 SER1.GND@49.101,70.883 GPS2.GND@49.101,75.421 ; SER1.GND@49.101,60.943 49.101,60.881 50.165,59.817 50.165,58.139 ADC.GND@49.101,57.075 49.701,57.675 USB.GND@56.721,57.675 ; 52.365,85.478 52.365,83.607 GPS2.6@52.451,83.521 ; ADC.3@52.451,55.225 54.901,57.675 USB.GND@56.721,57.675 ; v1(55.143,60.071) 55.143,57.912 55.381,57.675 USB.GND@56.721,57.675 ; GPS1.GND@56.721,73.028 56.769,72.98 v1(56.769,71.882) ; I2C.4@60.071,67.285 60.579,67.793 v1(60.579,69.342)
  Top Layer w0.502: POWER1.7@110.275,64.246 POWER2.7@110.275,69.104
  Top Layer w0.508: POWER1.7@110.275,64.246 POWER2.7@110.275,69.104
  Top Layer w0.902: USBMEGA.14@95.748,45.447 101.074,45.448 101.854,46.228 101.854,49.657 104.093,51.896 POWER1.6@105.625,51.896 ; POWER1.5@105.625,53.896 POWER1.6@105.625,51.896 ; POWER2.6@105.625,71.454 108.886,71.454 110.275,70.065 POWER1.7@110.275,64.246 ; RSTMEGA.4@108.458,40.737 109.116,41.395 USBPX4.15@111.262,41.394 USBPX4.13@111.262,45.574 111.262,48.559 POWER1.7@110.275,49.546 107.975,49.546 POWER1.6@105.625,51.896 ; POWER2.7@110.275,69.104 116.189,69.104 GND.8@116.459,68.834 ; GND.1@116.459,86.614 GND.15@116.459,51.054 116.459,50.038 117.475,49.022 120.269,49.022 121.402,47.889 USBPX4.16@121.402,41.394
  Top Layer w0.908: CPU_SOCKET.HOLE2@93.424,71.115 94.423,70.116 CPU_SOCKET.SIT2@94.423,69.215 96.662,71.454 105.625,71.454 POWER2.5@105.625,73.454 ; POWER2.7@110.275,83.804 116.189,83.804 GND.2@116.459,84.074 ; USBPX4.15@111.262,41.394 USBPX4.16@121.402,41.394
  Top Layer w0.95: v1(84.074,80.899) v1(84.074,80.141) 84.074,77.978 85.852,76.2 92.71,76.2 94.423,74.487 CPU_SOCKET.SIT2@94.423,69.215
  Mid-Layer 1 w0.25: v1(55.88,48.895) 60.071,53.086 v1(62.865,53.086)
  Bottom Layer w0.15: C4.1@50.8,49.468 50.8,49.911 49.784,50.927 49.022,50.927 47.879,50.927 47.371,50.419 47.371,47.244 47.117,46.99 45.147,46.99 C3.1@44.069,48.068 43.372,48.068 42.799,48.641 42.799,50.673 44.577,52.451 50.165,52.451 51.943,54.229 54.229,54.229 54.356,54.102 U4.5@54.356,52.781 54.356,53.848 54.737,54.229 55.626,54.229 55.88,53.975 55.954,53.975 U4.3@55.954,52.781 ; v1(55.143,60.071) U4.21@55.143,61.519 ; C2.1@63.119,55.688 63.119,54.864 63.754,54.229 67.564,54.229 67.691,54.356 68.58,54.356 69.088,54.864 C1.1@69.088,55.434 ; MEGA_IO.29@82.677,40.767 MEGA_IO.30@82.677,43.307
  Bottom Layer w0.25: v1(41.021,49.784) 41.021,48.768 41.783,48.006 44.007,48.006 C3.1@44.069,48.068 ; v1(42.573,71.755) 45.285,69.043 v1(45.892,69.043) ; v1(43.053,59.563) 44.577,57.912 v1(44.577,57.404) ; v1(55.88,48.895) 55.88,52.708 U4.3@55.954,52.781 ; v1(56.769,71.882) 56.642,71.755 v1(56.642,70.104) 59.817,70.104 v1(60.579,69.342) ; v1(62.865,53.086) 62.865,55.434 C2.1@63.119,55.688 ; C1.1@69.088,55.434 69.85,54.672 69.85,52.959 71.12,51.689 75.311,51.689 76.073,52.451 76.073,57.785 74.219,59.639 U5.1@74.168,59.639 ; CPU_SOCKET.HOLE1@71.422,71.115 73.449,69.088 v1(75.438,69.088) 74.549,69.088 73.787,68.326 73.787,68.072 74.422,67.437 75.184,67.437 75.819,66.802 75.819,64.389 74.168,62.738 U5.1@74.168,59.639 ; MEGA_IO.30@82.677,43.307 83.993,44.623 PSM.6@83.993,55.806 83.03,56.769 79.502,56.769 76.632,59.639 U5.1@74.168,59.639
  Bottom Layer w0.95: PSM.14@83.993,78.806 83.993,80.818 v1(84.074,80.899)
I2C_1_SCL: CPU_SOCKET.37 GPS1.4 | length 29.2
  Top Layer w0.15: GPS1.4@60.071,78.628 v1(73.66,78.628) ; v1(79.629,69.977) 80.137,69.977 81.671,68.443 CPU_SOCKET.37@81.671,66.649
  Mid-Layer 2 w0.15: v1(73.66,78.628) 79.629,72.659 v1(79.629,69.977)
I2C_1_SDA: CPU_SOCKET.35 GPS1.5 | length 32.5
  Top Layer w0.15: GPS1.5@60.071,79.878 65.41,79.878 66.04,79.248 v1(74.295,79.248) ; v1(79.375,69.469) 80.01,69.469 81.153,68.326 CPU_SOCKET.35@81.17,66.648
  Mid-Layer 2 w0.15: v1(74.295,79.248) 74.168,79.375 73.279,79.375 72.898,78.994 72.898,78.359 73.279,77.978 73.787,77.978 79.121,72.644 79.121,69.723 v1(79.375,69.469)